# Altium PCB Driver Morpheus PONTE H.PcbDoc
Units mm, origin at the board's own origin, x right, y up, seen from the top; angles counter-clockwise.
Board outline 44.88 x 30.93 mm, 2 copper layers (Top Layer, Bottom Layer); 48 components, 26 nets, 132 pads, 10 vias.
Unrouted connection lines stored in the file: 3.
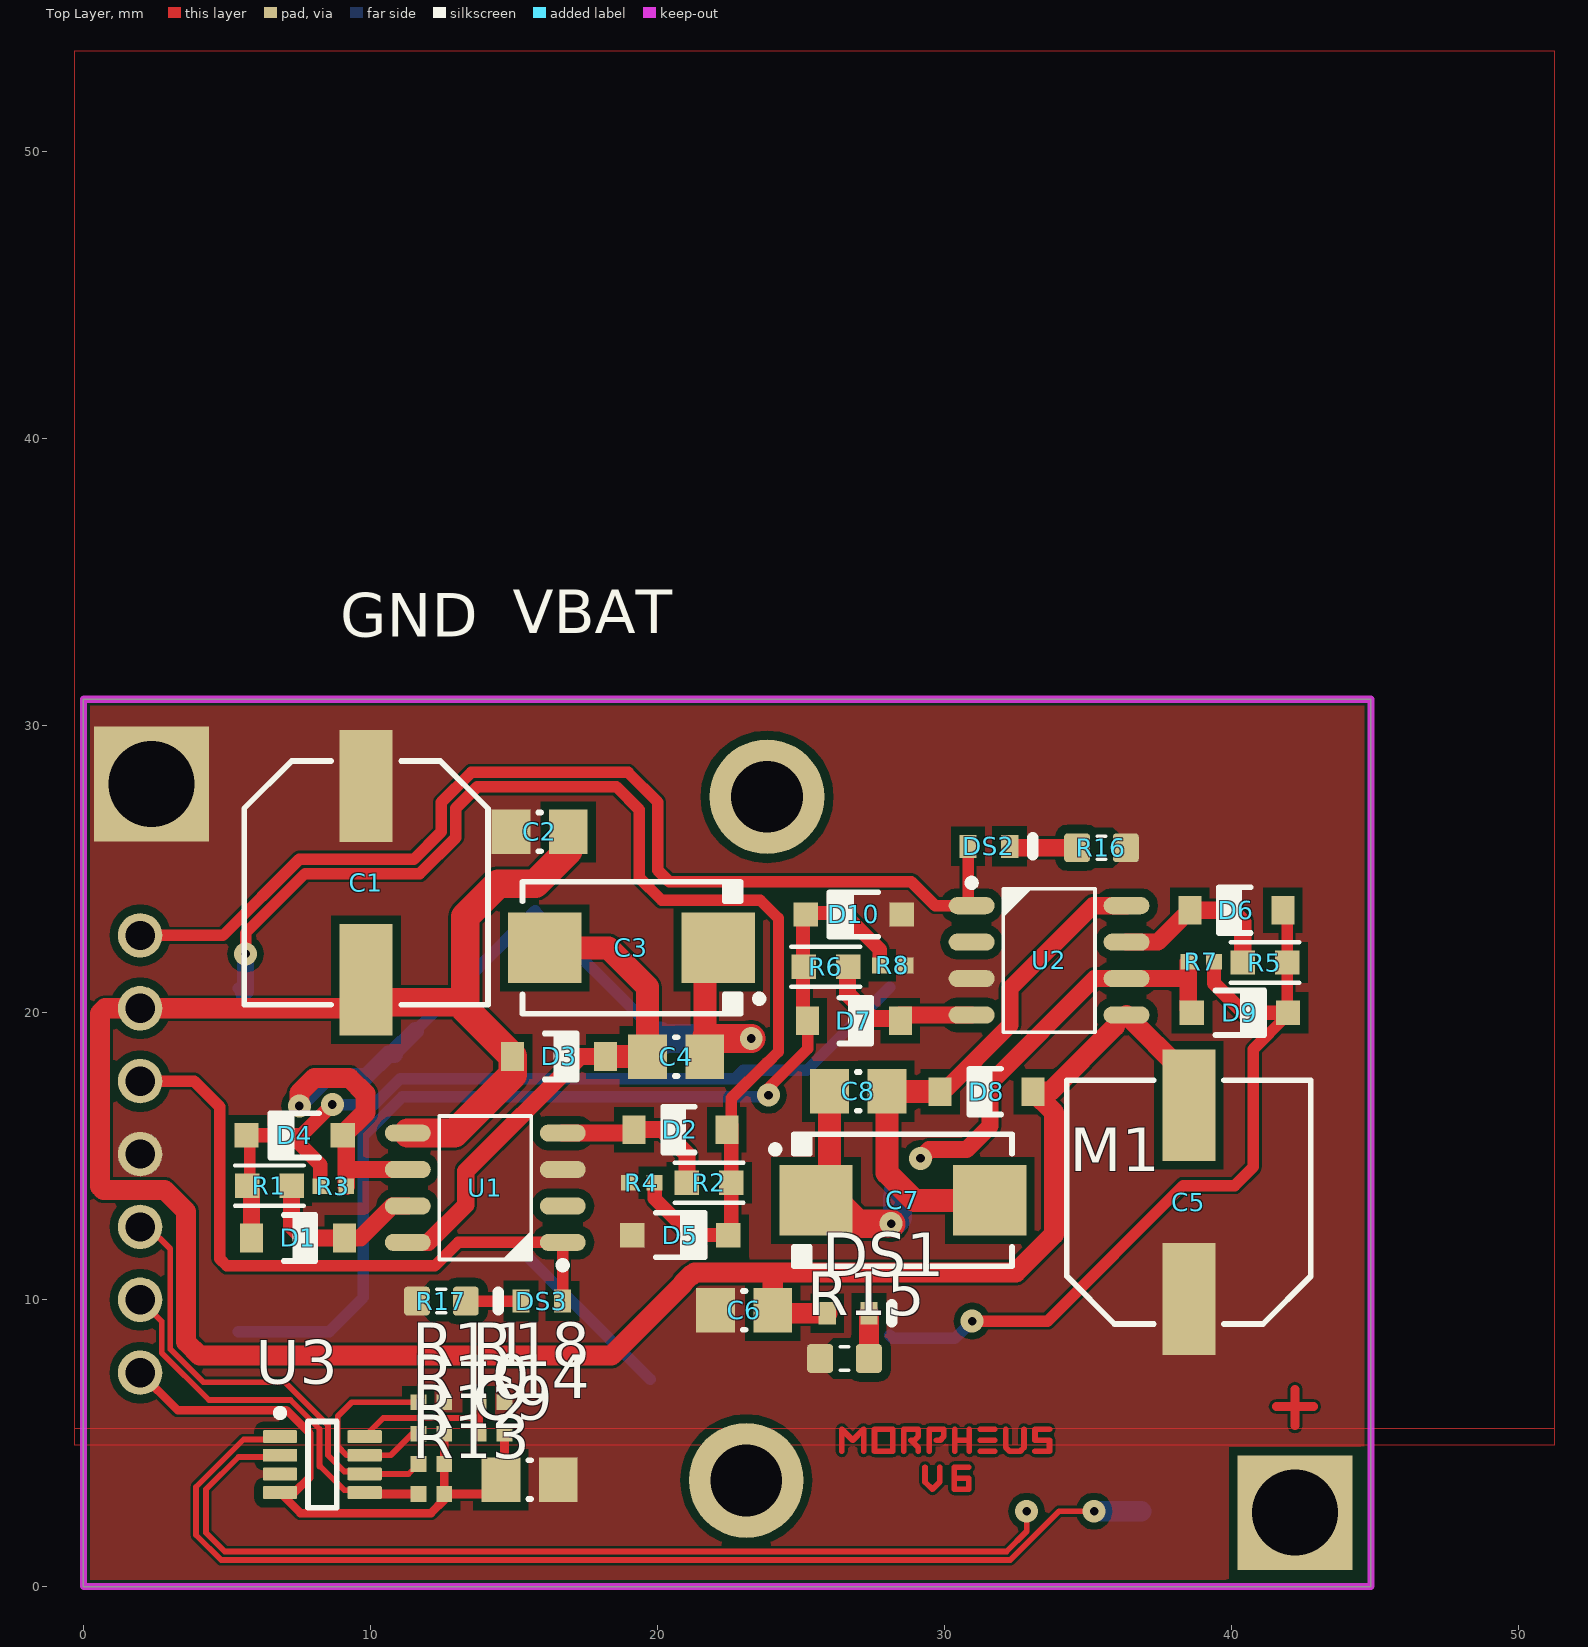
[diagram p0: Top Layer view]
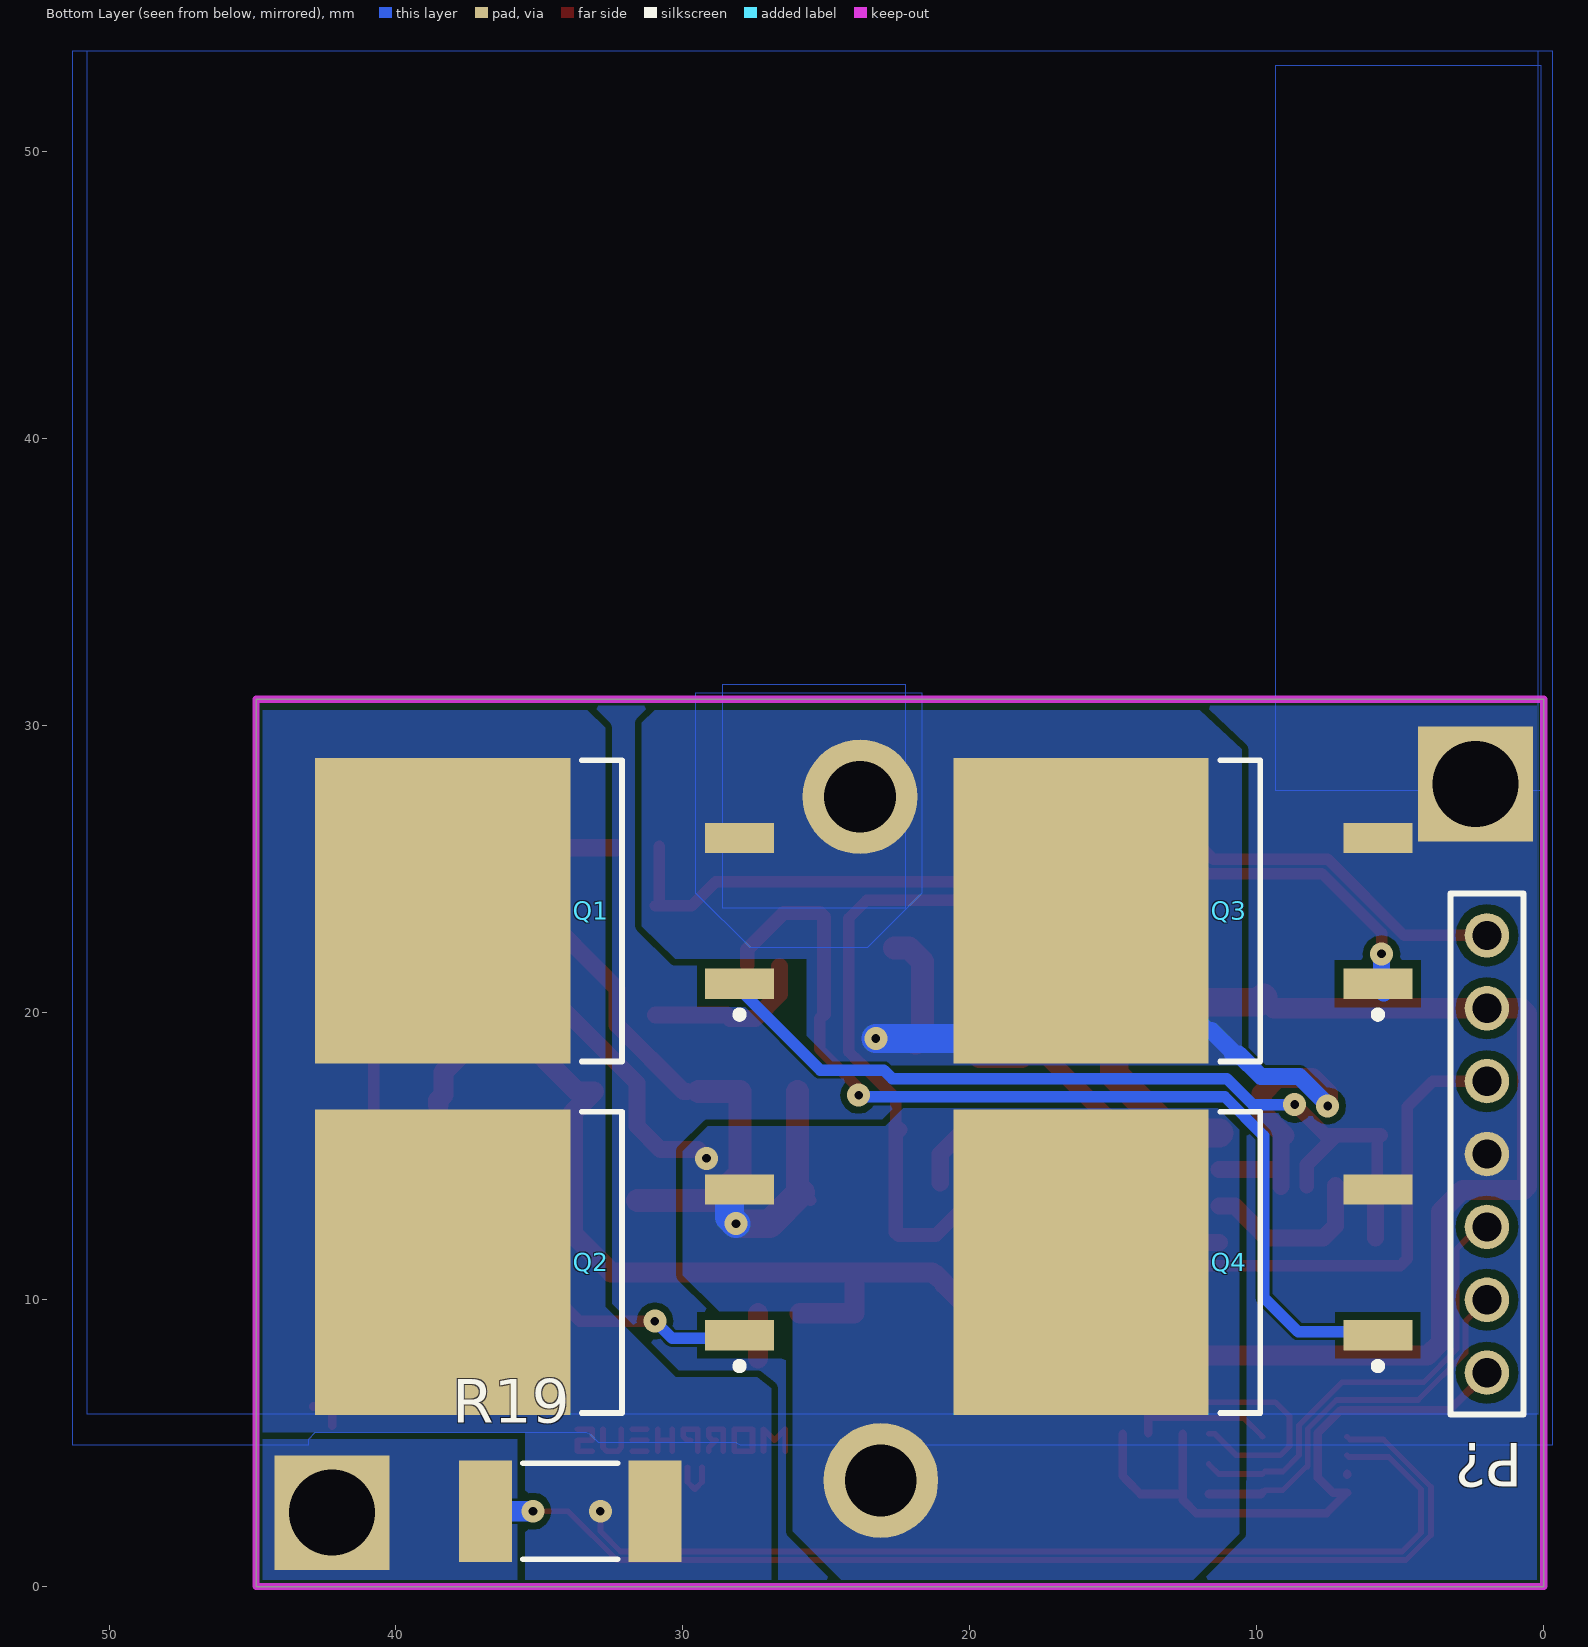
[diagram p1: Bottom Layer view, seen from below]

## Layer stack, top to bottom
Top Solder: solder mask 0.0102, Solder Resist, Dk 3.5
Top Layer: signal copper 0.0356
Dielectric 1: dielectric 0.32, FR-4, Dk 4.8
Bottom Layer: signal copper 0.0356
Bottom Solder: solder mask 0.0102, Solder Resist, Dk 3.5

## Board outline
0,0 44.875,0 44.875,30.925 0,30.925

## Design rules (kind name [scope] priority, off if disabled: settings)
BoardOutlineClearance [All] p1: gap=0 ignorepadtopadclearanceinfootprint=FALSE
Clearance Clearance_1 [IsPad vs InPolygon] p1: gap=0.3 ignorepadtopadclearanceinfootprint=TRUE
Clearance [All] p2: gap=0.24 ignorepadtopadclearanceinfootprint=TRUE except(0: SMDPad-Hole THPad-Hole Via-Hole Fill-Hole Poly-Hole Region-Hole Text-Hole; 0.1: Arc-Arc Arc-Track Arc-SMDPad Arc-THPad Arc-Via Arc-Fill Arc-Poly Arc-Region Arc-Text Arc-Hole Track-Track Track-SMDPad Track-THPad Track-Via Track-Fill Track-Poly Track-Region Track-Text Track-Hole)
ComponentClearance [All vs InComponentClass('IGNORA')] p1: gap=-1 collisioncheckmode=3 verticalgap=-1 showdistances=FALSE
ComponentClearance ComponentClearance_1 [All] p2: gap=0.254 collisioncheckmode=3 verticalgap=0.254 showdistances=FALSE
PlaneConnect [All] p1: planeconnectstyle=Direct reliefexpansion=0.508 reliefentries=4 reliefconductorwidth=0.254 reliefairgap=0.254
PolygonConnect [All] p1: connectstyle=Direct reliefconductorwidth=0.254 reliefentries=4 polygonreliefangle="90 Angle" airgapwidth=0.254
RoutingVias [All] p1: holewidth=0.3 width=0.4 viastyle="Through Hole" minholewidth=0.3 minwidth=0.4 maxholewidth=0.4 maxwidth=0.6
SMDNeckDown [InNet('No Net')] p1: percent=70.000
SolderMaskExpansion [All] p1: expansion=0.102
Width [All] p1: maxlimit=15 minlimit=0.01 preferedwidth=0.3
28 further rules are at their usual default settings.

## Classes and differential pairs
component class "Driver Morpheus SENSOR CORRENTE": C9 R10 R11 R12 R13 R14 R18 U3
component class "Driver Morpheus PONTE H": C1 C2 C3 C4 C5 C6 C7 C8 D1 D2 D3 D4 D5 D6 D7 D8 D9 D10 DS1 DS2 DS3 P? Q1 Q2 Q3 Q4 R1 R2 R3 R4 R5 R6 R7 R8 R15 R16 R17 U1 U2

## Components (designator, comment, footprint, x,y, rotation, side; value= is the part's Value field where it differs from the comment)
C1 "100uF 25v" CAPAE9083X70M 9.85,24.525 r270 top
C2 "CAP 100nF 25V 0805(2012)" CAPC0805(2012)145_M#1 15.9,26.3 r0 top value=100nF
C3 "Cap_10u_35v" "CAP POL 2917/7343" 19.101,22.262 r180 top
C4 "CAP 100nF 25V 0805(2012)" CAPC0805(2012)145_M#2 196.297,-55.572 r180 top value=100nF
C5 "100uF 25v" CAPAE9083X70M 38.525,13.4 r90 top
C6 "CAP 100nF 25V 0805(2012)" CAPC0805(2012)145_M#1 23.025,9.625 r0 top value=100nF
C7 "Cap_10u_35v" "CAP POL 2917/7343" 28.561,13.463 r0 top
C8 "CAP 100nF 25V 0805(2012)" CAPC0805(2012)145_M#2 -148.635,91.297 r0 top value=100nF
C9 "CAP 100nF 25V 0805(2012)" CAPC0805(2012)145_M#1 15.55,3.725 r180 top value=100nF
D1 "1N4148W" JSCJ-SOD-123-2_V 7.481,12.15 r0 top
D2 "1N4148W" JSCJ-SOD-123-2_V 20.806,15.925 r180 top
D3 "1N4148W" JSCJ-SOD-123-2_V 16.581,18.475 r0 top
D4 "MMSZ5246B-E3-08" VISH-SOD-123-2_V 7.356,15.725 r180 top
D5 "MMSZ5246B-E3-08" VISH-SOD-123-2_V 20.8,12.25 r0 top
D6 "1N4148W" JSCJ-SOD-123-2_V 40.181,23.575 r180 top
D7 "1N4148W" JSCJ-SOD-123-2_V 26.85,19.725 r0 top
D8 "1N4148W" JSCJ-SOD-123-2_V 31.48,17.25 r180 top
D9 "MMSZ5246B-E3-08" VISH-SOD-123-2_V 40.306,20 r0 top
D10 "MMSZ5246B-E3-08" VISH-SOD-123-2_V 26.85,23.425 r180 top
DS1 "TLMB1100-GS08" VISH-TLMX1100-2_V 26.65,9.525 r0 top
DS2 "TLMB1100-GS08" VISH-TLMX1100-2_V 31.556,25.8 r0 top
DS3 "TLMB1100-GS08" VISH-TLMX1100-2_V 15.975,9.95 r180 top
P? "TSW-107-05-T-S" SMTC-TSW-107-05-X-S 1.975,22.695 r270 bottom
Q1 "IRF3205S" D2PAK_N 34.825,23.55 r0 bottom
Q2 "IRF3205S" D2PAK_N 34.825,11.3 r0 bottom
Q3 "IRF3205S" D2PAK_N 12.575,23.55 r0 bottom
Q4 "IRF3205S" D2PAK_N 12.575,11.3 r0 bottom
R1 "22" SMD-0603-RES 6.481,13.975 r270 top
R2 "22" SMD-0603-RES 21.806,14.075 r90 top
R3 "RC0402JR-071KL" RES-0402 8.706,13.95 r180 top value=1K
R4 "RC0402JR-071KL" RES-0402 19.456,14.075 r0 top value=1K
R5 "22" SMD-0603-RES 41.181,21.75 r270 top
R6 "22" SMD-0603-RES 25.875,21.6 r90 top
R7 "RC0402JR-071KL" RES-0402 38.956,21.775 r0 top value=1K
R8 "RC0402JR-071KL" RES-0402 28.206,21.65 r180 top value=1K
R10 "RC0402JR-071KL" RES-0402 12.125,5.325 r0 top value=10K
R11 "RC0402JR-071KL" RES-0402 12.125,6.425 r180 top value=10K
R12 "RC0402JR-071KL" RES-0402 12.125,4.275 r0 top value=10K
R13 "RC0402JR-071KL" RES-0402 12.125,3.225 r0 top value=10K
R14 "RC0402JR-071KL" RES-0402 14.225,5.325 r0 top value=10K
R15 "Thick Film" RESC1608X55N 26.525,7.95 r180 top value=1k
R16 "Thick Film" RESC1608X55N 35.481,25.75 r0 top value=220R
R17 "Thick Film" RESC1608X55N 12.475,9.95 r180 top value=220R
R18 "RC0402JR-071KL" RES-0402 14.225,6.425 r180 top value=10K
R19 "71-WSLF25121L000FEA" RESC6432X89X76ML25T25 33.925,2.625 r0 bottom
U1 "IR2184" SOIC127P600X175-8AN 14.006,13.9 r180 top
U2 "IR2184" SOIC127P600X175-8AN 33.656,21.825 r0 top
U3 "INA219AIDCNR" DCN0008A_M 8.325,4.25 r0 top

## Footprints (in the part's own frame and the unit in brackets; to place one, negate y for a bottom-side part, rotate by r counter-clockwise, add the part's x,y. Pads: shape width x height; smd on the part's side, far side on the other; paste and mask are expansions set on the pad)
"CAP POL 2917/7343" [mm] "Molded Capacitor, 2-Leads, Body 7.30x4.30mm, IPC Medium Density"
  rect 2.55x2.45 smd: 1(-3.025,0) 2(3.025,0)
  silkscreen extent -4.58,-2.3 3.8,2.3, body extent -3.65,-2.15 3.65,2.15, height 4.1
CAPAE9083X70M [mm] "Aluminum Electrolytic Capacitor, Body 8,30x8,30x7,00mm, IPC Low Density"
  rect 3.9x1.85 smd: 1(-3.375,0) 2(3.375,0)
  silkscreen extent -4.25,-4.25 4.25,4.25, body extent -4.25,-4.25 4.25,4.25, height 7
CAPC0805(2012)145_M#1 [mm] "Chip Capacitor, Body 2.0x1.2mm, Height 1.45mm, IPC Low Density"
  rect 1.35x1.55 smd: 1(-1,0) 2(1,0)
  silkscreen extent -0.05,-0.67 0.05,0.67, body extent -1.1,-0.72 1.1,0.72, height 1.45
CAPC0805(2012)145_M#2 [mm] "Chip Capacitor, Body 2.0x1.2mm, Height 1.45mm, IPC Low Density"
  rect 1.35x1.55 smd: 1(174.641,-74.041) 2(176.641,-74.041)
  silkscreen extent 175.59,-74.72 175.69,-73.37, body extent 174.54,-74.77 176.74,-73.32, height 1.45
D2PAK_N [mm] "D-PAK/TO-263-3; 3 Leads (1 Cropped); Body 14.7 (inc. leads) x 10.2 mm (LxW max)"
  rect 2.4x1.05 smd: 1(-6.8,2.54) 3(-6.8,-2.54)
  rect 8.9x10.65 smd: 2(3.55,0)
  silkscreen extent -6.92,-5.25 -1.3,5.25, body extent -2.7,-5.28 6.3,5.28, height 4.69
DCN0008A_M [mm] "SOT23, 8-Leads, Body 3x1.75mm, Pitch 0.65mm, IPC Low Density"
  rrect22% 1.2x0.45 smd: 1(-1.475,0.975) 2(-1.475,0.325) 3(-1.475,-0.325) 4(-1.475,-0.975) 5(1.475,-0.975) 6(1.475,-0.325) 7(1.475,0.325) 8(1.475,0.975)
  silkscreen extent -1.6,-1.5 0.5,1.92, body extent -0.88,-1.5 0.87,1.5, height 1.45
JSCJ-SOD-123-2_V [mm] "SMD, 2-Leads, Body 2.7x1.6mm, Height 1.25mm"
  rect 0.8x1 smd: 1(-1.62,0) 2(1.62,0)
  silkscreen extent -0.5,-0.8 0.6,0.8, body extent -1.35,-0.8 1.35,0.8, height 1.25
RES-0402 [mm]
  rect 0.55x0.55 smd: 1(-0.45,0) 2(0.45,0)
  body extent -0.53,-0.27 0.53,0.28, height 0.4
RESC1608X55N [mm] "Chip Resistor, Body 1.6x0.8mm, EIA 0603, IPC Medium Density"
  round 0.254 on Mech15: 0(0,0)
  rrect25% 0.9x1 smd: 1(-0.85,0) 2(0.85,0)
  Top Layer pour cut-out: -0.6,0.5 -0.4,0.7 0.4,0.7 0.6,0.5 0.6,-0.5 0.4,-0.7 -0.4,-0.7 -0.6,-0.5
  silkscreen extent -0.15,-0.41 0.15,0.41, body extent -0.87,-0.47 0.88,0.48, height 0.54
RESC6432X89X76ML25T25 [mm] "Chip Resistor, 2-Leads, Body 6.6x3.43mm, IPC Low Density"
  rect 1.85x3.55 smd: 1(-2.95,0) 2(2.95,0)
  silkscreen extent -1.65,-1.68 1.65,1.68, body extent -3.3,-1.72 3.3,1.71, height 0.89
SMD-0603-RES [mm]
  rect 0.85x0.85 smd: 1(0,0.775) 2(0,-0.775)
  silkscreen extent -0.7,-1.2 0.7,1.2, body extent -0.4,-0.85 0.4,0.85, height 0.56
SMTC-TSW-107-05-X-S [mm] ".025 SQ Post Terminal Strip Assembly, 1x7 Pins, Vertical, 2.54mm Pitch, Male"
  round 1.55 hole 1.02: 1(0,0) 2(2.54,0) 3(5.08,0) 4(7.62,0) 5(10.16,0) 6(12.7,0) 7(15.24,0)
  silkscreen extent -1.46,-1.27 16.7,1.27, body extent -1.27,-1.27 16.51,1.27, height 5.21
SOIC127P600X175-8AN [mm] "SOIC, 8-Leads, Body 4.9x3.9mm, Pitch 1.27mm, IPC Medium Density"
  round 1 on Mech15: 0(0,0)
  oval 1.6x0.6 smd: 1(-2.7,1.905) 2(-2.7,0.635) 3(-2.7,-0.635) 4(-2.7,-1.905) 5(2.7,-1.905) 6(2.7,-0.635) 7(2.7,0.635) 8(2.7,1.905)
  silkscreen extent -2.83,-2.5 1.6,2.82, body extent -3,-2.45 3,2.45, height 1.75
VISH-SOD-123-2_V [mm] "SMD, 2-Leads, Body 2.7x1.55mm, Height 1.35mm"
  rect 0.85x0.85 smd: 1(-1.675,0) 2(1.675,0)
  silkscreen extent -0.85,-0.78 0.85,0.78, body extent -1.35,-0.77 1.35,0.77, height 1.35
VISH-TLMX1100-2_V [mm] "SMD, 2-Leads, Body 1.6x0.8mm"
  rect 0.6x0.8 smd: 1(-0.725,0) 2(0.725,0)
  silkscreen extent 1.53,-0.3 1.53,0.3, body extent -0.8,-0.4 0.8,0.4, height 0.65

## Part data
C1: library part Cap_10u_35v
C2 C4 C6 C8 C9: library part CMP-1036-04408-1, "CAP 100nF 25V ±5% 0805 (2012 Metric) Thickness 1.45mm SMD", Case-EIA=0805, Case-Metric=2012, Rated Voltage="25 V", Tolerance=±5%, Max Thickness="1.45 mm", Technology=SMT
C5: library part Cap_100u_25v, "Cap Tântalo"
D1 D2 D3 D6 D7 D8: library part CMP-0914-00001-1, "Fast Switching Diode, 75 V, 150 mA, 2-Pin 2.7 x 1.6 x 1.25 mm SMD, Tape and Reel", Manufacturer="Changjiang Electronics", ComponentLink1Description="Manufacturer URL", ComponentLink1URL=http://www.cj-elec.com/, ComponentLink2Description=Datasheet, ComponentLink2URL=http://www.cj-elec.com/txUpfile/20121613352740313.pdf, ComponentLink3Description="Package Specification", ComponentLink3URL=http://www.cj-elec.com/txUpfile/201412112231195145.pdf, DatasheetVersion="Rev. A", IO (mA)=150, IR (uA)=1, Mounting Technology="Surface Mount", PackageDescription="2-Pin SMD, Body 2.7 x 1.6 mm, Height 1.25 mm", PackageReference=SOD-123-2, PackageVersion="Rev. A", Packing="Tape and Reel", PartNumber=1N4148W, PD (mW)=350, Trr (ns)=4, TSTG (degC)="-55 to 150", VF (V)=1.25, VR (V)=75
D4 D5 D9 D10: library part CMP-0931-00032-1, "Small Signal Zener Diode, 16 V +/- 5%, -55 to 155 degC, 2-Pin SOD-123, RoHS, Tape and Reel", Manufacturer="Vishay Semiconductor", Operating Temperature="-55 to 150 degC", Power Dissipation (mW)=500, Test Current (IZT1) (mA)=7.8, Tolerance="+/- 5%", Zener Voltage (NOM.) (V)=16, ComponentLink1Description="Manufacturer URL", ComponentLink1URL=http://www.vishay.com/, ComponentLink2Description=Datasheet, ComponentLink2URL=http://www.vishay.com/docs/85774/mmsz5225.pdf, ComponentLink3Description="Package Specification", ComponentLink3URL=http://www.vishay.com/docs/85774/mmsz5225.pdf, DatasheetVersion="Rev. 1.9", Int. Construction=Single, Mounting Technology="Surface Mount", PackageDescription="2-Pin SMD, Body 2.7 x 1.55 mm, Height 1.35 mm", PackageReference=SOD-123-2, PackageVersion="Rev. 1.9", Packing="Tape and Reel", PartNumber=MMSZ5246B-E3-08, RoHS=TRUE, Zener Impedance (IZT1) (Max.) (Ohm)=17
DS1 DS2 DS3: library part CMP-1666-00028-1, "Blue LED, 10 mA, 3.9 V, -40 to 100 degC, 2-Pin SMD (0603), RoHS, Tape and Reel", Capacitance="10 nF", Case\Package=Radial, Max Operating Temperature="125 degC", Min Operating Temperature="-55 degC", Package Quantity=500, Tolerance=10%, Type (Capacitors)=X7R, Voltage Rating="100 V", ComponentLink1Description="Manufacturer URL", ComponentLink1URL=http://www.vishay.com/, ComponentLink2Description=Datasheet, ComponentLink2URL=http://download.siliconexpert.com/pdfs/2016/8/7/12/43/26/667/vsh_/manual/379263299541529tlmb1100.pdf, DatasheetVersion="Rev. 2.7, 03/2016", Height="2.54 mm", Lead Pitch="2.54 mm", Length="5.33 mm", Mount="Through Hole", PackageDescription="2-Pin Surface Mount Device, Body 1.6 x 0.8 mm", PackageReference=0603, Packaging=Bulk, Pins=2, Radiation Hardening=No, REACH SVHC="No SVHC", RoHSCompliant=true, Width="3.81 mm"
P?: library part CMP-1024-00399-1, Manufacturer=Samtec, Temperature Range="-55 to 105 degC", ComponentLink1Description="Manufacturer URL", ComponentLink1URL=http://www.samtec.com, ComponentLink2Description=Datasheet, ComponentLink2URL=http://www.samtec.com/documents/webfiles/pdf/TSW_TH.PDF, ComponentLink3Description="Package Specification", ComponentLink3URL=http://www.samtec.com/documents/webfiles/cpdf/TSW-XXX-XX-XXX-X-XX-XXX-MKT.pdf, DatasheetVersion=F-214, Mounting Technology=Through-hole, Orientation=Vertical, PackageDescription=".025[0.64] SQ. Post Terminal Strip Assembly", PackageReference=TSW-107-05-X-S, PackageVersion="DM, 8/1988", PartNumber=TSW-107-05-T-S, Pitch="2.54 mm", RoHS=True
Q1 Q2 Q3 Q4: "HEXFET Power MOSFET", ComponentLink1Description="Manufacturer Link", ComponentLink1URL=http://www.irf.com/, ComponentLink2Description=Datasheet, ComponentLink2URL=http://www.irf.com/product-info/datasheets/data/irf3205s.pdf, DatasheetVersion=Aug-1997, LatestRevisionDate=20-Nov-2009, LatestRevisionNote="IPC-7351 Footprint Added.", PackageDescription="3-Pin Transistor Outline Package 2.54 mm Pitch, 15.1 mm Lead Span", PackageReference=D2PAK, Published=8-Jun-2000, Publisher="Altium Limited"
R1 R2 R5 R6: library part ERJ-3EKF22R0V, "RES SMD 22 OHM 1% 1/10W 0603", Digi-Key Part Number=P22.0HCT-ND, Manufacturer="Panasonic Electronic Components", Operating Temperature="-55°C ~ 155°C", Package / Case="0603 (1608 Metric)", Power (Watts)="0.1W, 1/10W", Supplier Device Package=0603, Temperature Coefficient=±100ppm/°C, Tolerance=±1%, @ qty=1500, Composition="Thick Film", Datasheets=http://industrial.panasonic.com/www-cgi/jvcr13pz.cgi?E+PZ+3+AOA0002+ERJ3EKF22R0V+7+WW, Factory Stock=0, Failure Rate=-, Features="Automotive AEC-Q200", Height - Seated (Max)="0.022\" (0.55mm)", Image=//media.digikey.com/Photos/Panasonic%20Photos/MFG_ERJ-P6W%20Series.jpg, Minimum Quantity=1, Number of Terminations=2, Packaging="Cut Tape (CT)", Part Number=ERJ-3EKF22R0V, Part Status=Active, Quantity Available=100321, Series=ERJ, Size / Dimension="0.063\" L x 0.031\" W (1.60mm x 0.80mm)", Unit Price (USD)=0.00379
R3 R4 R7 R8 R10 R11 R12 R13 R14 R18: library part "RES 1K 0402", "RES SMD 1K OHM 5% 1/16W 0402"
R15 R16 R17: library part RES_220R_0603_5%, "Resistor SMD chip 220 Ohm 0.1W 5% 0603", Manufacturer 1=Yageo, Manufacturer 2="Panasonic Electronic Components", Manufacturer 3="Stackpole Electronics Inc", Manufacturer 4="Rohm Semiconductor", Manufacturer 5="Royal Ohm", Manufacturer Part Number 1=RC0603JR-07220RL, Manufacturer Part Number 2=ERJ-3GEYJ221V, Manufacturer Part Number 3=RMCF0603JT220R, Manufacturer Part Number 4=MCR03ERTJ221, Manufacturer Part Number 5=0603WAJ0221, Package / Case="0603 (1608 metric)", Ratings="1/10 W", Supplier Part Number 1=311-220GRCT-ND, Tolerance=±5%, ComponentLink1Description=http://www.yageo.com/documents/recent/PYu-RC0603_51_RoHS_L_4.pdf, ComponentLink1URL=http://www.yageo.com/documents/recent/PYu-RC0603_51_RoHS_L_4.pdf, ComponentLink2Description=http://industrial.panasonic.com/www-cgi/jvcr13pz.cgi?E+PZ+3+AOA0001+ERJ3GEYJ221V+7+WW, ComponentLink2URL=http://industrial.panasonic.com/www-cgi/jvcr13pz.cgi?E+PZ+3+AOA0001+ERJ3GEYJ221V+7+WW, ComponentLink3Description=http://www.seielect.com/Catalog/SEI-RMCF_RMCP.pdf, ComponentLink3URL=http://www.seielect.com/Catalog/SEI-RMCF_RMCP.pdf, ComponentLink4Description=http://rohmfs.rohm.com/en/products/databook/datasheet/passive/resistor/chip_resistor/mcr_g.pdf, ComponentLink4URL=http://rohmfs.rohm.com/en/products/databook/datasheet/passive/resistor/chip_resistor/mcr_g.pdf, Material="Thick Film", RoHS 1="RoHS Compliant", RoHS 2="RoHS Compliant", RoHS 3="RoHS Compliant", RoHS 4="RoHS Compliant", SCDType=spec, Supplier 1=Digi-Key, Supplier 2=Digi-Key, Supplier 3=Digi-Key, Supplier 4=Digi-Key, Supplier Part Number 2=P220GCT-ND, Supplier Part Number 3=RMCF0603JT220RCT-ND, Supplier Part Number 4=RHM220CGCT-ND
R19: library part CMP-2000-07419-1, "Chip Resistor, 9 mOhm, +/- 1%, 1 W, -65 to 170 degC, 2512 (6432 Metric), RoHS, Tape and Reel                        71-WSLF25121L000FEA", Case Code - in=2512, Case Code - mm=6432, Case Height=0.635mm, Case Length=6.4mm, Case Width=3.2mm, Manufacturer=Vishay, Operating Temperature Range=-65Cto+170C, Package / Case=2512(6432metric), Package Description="2-Pin Surface Mount Device, Body 6.35 x 3.18 mm", Power Rating=6W, Resistance=0.009Ohms, Temperature Coefficient=75PPM/C, Tolerance=1%, Brand=Vishay/Dale, Datasheet URL=http://www.vishay.com/docs/30100/wsl.pdf, Datasheet Version=07/2016, Factory Pack Quantity=2000, Manufacturer URL=http://www.vishay.com/, Mounting Technology=SurfaceMount, Package Reference=2512, Packaging=Reel, Product=MetalElementCurrentSensingResistors, Product Category=CurrentSenseResistors-SMD, RoHS=Details, Series=WSL, Termination Style=SMD/SMT, Type=PowerMetalStripResistors,LowValue(downto0.0005Ohms),SurfaceMount
U1 U2: PSpiceTemplate="X^@REFDES %VCC %IN %SD %COM %VB %HO %VS %LO @MODEL PARAMS:  ?CDELAY|CDELAY=@CDELAY||CDELAY=50N| ?RDELAY|RDELAY=@RDELAY||RDELAY=50| ?T1|T1=@T1||T1=-40| ?T2|T2=@T2||T2=25| ?T3|T3=@T3||T3=125| ?V1|V1=@V1||V1=10| ?V2|V2=@V2||V2=15| ?V3|V3=@V3||V3=20| ?TOFFT1|TOFFT1=@TOFFT1||TOFFT1=270N| ?TOFFT2|TOFFT2=@TOFFT2||TOFFT2=270N| ?TOFFT3|TOFFT3=@TOFFT3||TOFFT3=270N| ?TOFFV1|TOFFV1=@TOFFV1||TOFFV1=270N| ?TOFFV2|TOFFV2=@TOFFV2||TOFFV2=270N| ?TOFFV3|TOFFV3=@TOFFV3||TOFFV3=270N| ?TONT1|TONT1=@TONT1||TONT1=210N| ?TONT2|TONT2=@TONT2||TONT2=210N| ?TONT3|TONT3=@TONT3||TONT3=210N| ?TONV1|TONV1=@TONV1||TONV1=210N| ?TONV2|TONV2=@TONV2||TONV2=210N| ?TONV3|TONV3=@TONV3||TONV3=210N|", CDELAY=50N, RDELAY=50, T1=-40, T2=25, T3=125, TOFFT1=270N, TOFFT2=270N, TOFFT3=270N, TOFFV1=270N, TOFFV2=270N, TOFFV3=270N, TONT1=210N, TONT2=210N, TONT3=210N, TONV1=210N, TONV2=210N, TONV3=210N, V1=10, V2=15, V3=20
U3: library part CMP-0704-00041-2, "Zero-Drift, Bi-directional Current / Power Monitor, 3 to 5.5 V, -40 to 125 degC, 8-pin SOP (DCN8), Green (RoHS & no Sb/Br)", Manufacturer="Texas Instruments", Quiescent Current (+/-)(Typ)(mA)=0.7, Rating=Catalog, CMRR(Min)(dB)=100, Code_JEDEC=MO-178, Common Mode Range(Max)(V)=26, Common Mode Range(Min)(V)=0, ComponentLink1Description="Manufacturer URL", ComponentLink1URL=http://www.ti.com/, ComponentLink2Description=Datasheet, ComponentLink2URL=http://www.ti.com/general/docs/lit/getliterature.tsp?genericPartNumber=INA219&fileType=pdf, ComponentLink3Description="Package Specification", ComponentLink3URL=http://www.ti.com/lit/ml/mpds099c/mpds099c.pdf, DatasheetVersion=SBOS448F, Eco-Plan="Green (RoHS & no Sb/Br)", Gain(V/V)="1, 0.5, 0.25, 0.125", Input Offset (+/-)(Max)(uV)=100, Mounting Technology="Surface Mount", PackageDescription="8-Pin Plastic Small Outline, Body 1.6 x 2.9 mm, Pitch 0.65 mm", PackageReference=DCN0008A, PackageVersion="4202106/D, 11/2009", PartNumber=INA219AIDCNR, Small-Signal Bandwidth(Typ)(MHz)=0.011, SubFamily="Current Shunt Monitor", Vs(Max)(V)=5.5, Vs(Min)(V)=3

## Free pads (board coordinates)
  rect 4x4 hole 3: 8(2.375,27.975) 8(42.225,2.575)
  round 4 hole 2.5: 8(23.1,3.7) 8(23.825,27.525)

## Via types
v1: diameter 0.8, hole 0.3, Top Layer to Bottom Layer, 10 vias

## Nets (pads, with @x,y where several pads share a name; then routed paths per layer and width w, separated by ;. In a path a pad name is that pad's centre, name@x,y a point inside that pad or via, vN(x,y) a via of type N, cw(c..) or ccw(c..) an arc to the next point about the centre after c; other vN are vias at no path point)
+3.3v: C9.2 P?.7 R10.2 R12.2 R13.2 R14.2 U3.4 | length 21.9
  Top Layer w0.3: P?.7 3.28,6.15 7.075,6.15 7.875,5.35 7.875,3.8 7.35,3.275 U3.4 7.565,2.56 12.112,2.56 12.575,3.023 R13.2 ; R10.2 R12.2 R13.2 ; R14.2 14.675,3.85 C9.2 14.05,3.225 R13.2
+12V: C1.2 C2.2 C5.2 C6.2 D3.1 D8.1 DS1.1 P?.2 U1.5 U2.5 | length 91.4
  Top Layer w0.4: C2.2@16.9,25.65 C2.2
  Top Layer w0.7: C1.2@9.775,20.525 9.405,20.155 P?.2 0.755,20.155 0.577,19.977 0.577,13.941 0.693,13.825 2.825,13.825 3.575,13.075 3.575,8.525 4.05,8.05 18.4,8.05 20.9,10.55 20.9,10.586 21.164,10.85 21.2,10.85 21.3,10.95 24.025,10.95 ; C6.2@24.025,9.525 DS1.1 ; C6.2 24.025,10.95 ; 35.956,19.519 33.686,17.25 D8.1 33.825,16.525 33.825,12.275 32.5,10.95 24.025,10.95 ; U2.5 38.35,17.926 38.35,17.125 38.525,16.95 C5.2
  Top Layer w1: C1.2@9.775,20.525 9.931,20.369 13.306,20.369 ; U1.5 12.93,15.805 14.961,17.836 D3.1 13.306,20.13 13.306,20.369 ; C2.2@16.9,25.65 15.75,24.5 14.456,24.5 13.306,23.35 13.306,20.369
A0: R10.1 R11.2 U3.7 | length 7.3
  Top Layer w0.2: R10.1 11.462,5.325 10.712,4.575 U3.7 9.173,4.575 8.86,4.888 8.86,5.935 9.35,6.425 R11.2
A1: R14.1 R18.2 U3.8 | length 5.3
  Top Layer w0.1: 13.725,5.875 13.775,5.825
  Top Layer w0.2: U3.8 10.45,5.875 13.725,5.875
  Top Layer w0.3: R14.1@13.775,5.35 13.775,5.825 R18.2@13.775,6.4
"BAT 5S": pad.8@42.225,2.575 R19.2 U3.1 | length 39.3
  Top Layer w0.2: U3.1 6.75,5.125 5.583,5.125 3.925,3.467 3.925,1.801 4.801,0.925 32.3,0.925 34,2.625 v1(35.225,2.625)
  Bottom Layer w0.7: v1(35.225,2.625) R19.2
GND: C1.1 C2.1 C5.1 C6.1 C9.1 D5.1 D10.1 P?.4 pad.8@2.375,27.975 Q3.3 Q4.3 R4.1 R8.1 R11.1 R15.2 R16.2 R17.2 R18.1 U1.3 U2.3 U3.3 | length 0
  Top Layer w0.3: U3.3@6.85,3.89 U3.3
IN_1: DS3.1 P?.3 U1.1 | length 23.2
  Top Layer w0.4: P?.3@1.625,17.615 P?.3 3.86,17.615 4.75,16.725 4.75,11.425 5,11.175 12.247,11.175 13.067,11.995 U1.1 16.7,11.989 DS3.1
IN_2: DS2.1 P?.1 U2.1 | length 37.7
  Top Layer w0.4: P?.1@1.625,22.695 P?.1 4.863,22.695 7.518,25.35 11.518,25.35 12.475,26.307 12.475,27.332 13.518,28.375 18.98,28.375 20.015,27.34 20.015,24.965 20.413,24.567 28.855,24.567 29.692,23.73 U2.1@30.831,23.73 ; DS2.1 U2.1@30.831,23.73 ; U2.1 U2.1@30.831,23.73
NetC3_1: C3.1 C4.1 D4.1 pad.8@23.825,27.525 Q1.3 Q3.2 R3.1 U1.6 | length 34.8
  Top Layer w0.4: D4.1 D4.1@9.156,15.6 ; 21.656,19.275 C4.1@21.731,19.2
  Top Layer w0.6: R3.1 D4.1@9.156,15.6 ; 9.171,14.535 U1.6
  Top Layer w0.7: v1(7.525,16.75) 7.525,17.2 8.05,17.725 9.275,17.725 9.825,17.175 9.825,16.519 D4.1
  Top Layer w0.8: 21.656,19.275 21.656,21.792 C3.1 C3.1@22.633,22.262
  Top Layer w1: C4.1@21.731,19.2 21.881,19.05 21.931,19.1 v1(23.275,19.1)
  Bottom Layer w0.4: 11.575,19.375 Q3.2@15.75,23.55 ; Q3.2@15.75,23.525 Q3.2@20.075,19.2
  Bottom Layer w0.6: v1(7.525,16.75) 7.525,16.782 8.518,17.775 9.85,17.775 10.631,18.556 10.844,18.556 ; 10.8,18.6 11.575,19.375
  Bottom Layer w1: Q3.2@20.075,19.2 20.225,19.05 20.275,19.1 v1(23.275,19.1)
NetC3_2: C3.2 C4.2 D3.2 U1.8 | length 18.3
  Top Layer w0.6: U1.8 12.02,11.995 13.325,13.3 13.325,14.475 17.325,18.475 D3.2
  Top Layer w0.8: C3.2 18.294,22.262 19.656,20.9 C4.2 ; D3.2 C4.2@19.65,18.475
NetC7_1: C7.1 C8.1 D9.1 pad.8@23.1,3.7 Q2.3 Q4.2 R7.1 U2.6 | length 28.9
  Top Layer w0.4: C7.1 25.798,13.725 C7.1@25.9,13.725 ; D9.1@38.506,19.819 D9.1@38.506,20.125
  Top Layer w0.6: C8.1@26.001,17.261 C8.1 ; v1(29.175,14.925) 29.478,15.228 30.778,15.228 31.6,16.05 31.6,17.55 35.24,21.19 U2.6 38.491,21.19 ; D9.1@38.506,20.125 R7.1
  Top Layer w0.8: C7.1@25.798,13.725 26.006,13.933 C8.1
  Top Layer w1: C7.1@25.9,13.725 26.975,12.65 v1(28.15,12.65)
  Bottom Layer w0.4: Q4.2@15.55,11.425 Q4.2@19.75,7.225 ; Q2.3@28.1,13.84 Q2.3@28.375,13.565
  Bottom Layer w1: v1(28.15,12.65) 28.375,12.875 Q2.3@28.375,13.565
NetC7_2: C7.2 C8.2 D8.2 U2.8 | length 18.2
  Top Layer w0.6: D8.2 29.974,17.25 32.296,19.572 32.296,20.842 35.184,23.73 U2.8
  Top Layer w0.8: D8.2@29.461,17.25 C8.2 28.006,14.419 28.962,13.463 C7.2
NetD1_1: D1.1 D4.2 Q1.1 R1.2 R3.2 | length 30.4
  Top Layer w0.4: R1.2 5.8,14.069 D4.2@5.8,15.725
  Top Layer w0.5: D4.2 5.8,15.725 7.231,15.725 ; R3.2 8.256,14.7 7.231,15.725 ; v1(8.675,16.801) 7.6,15.725 7.231,15.725
  Top Layer w0.6: R1.2 5.861,13.82 D1.1
  Bottom Layer w0.4: v1(8.675,16.801) 10.136,16.801 11.041,17.705 22.705,17.705 23,18 25.215,18 Q1.1@28.1,20.885
NetD1_2: D1.2 R1.1 U1.7 | length 6.1
  Top Layer w0.6: R1.1 7.256,12.575 7.681,12.15 D1.2 9.65,12.15 10.765,13.265 U1.7
NetD2_1: D2.1 D5.2 Q3.1 R2.2 R4.2 | length 42.8
  Top Layer w0.4: v1(5.65,22.05) 5.65,22.775 7.725,24.85 11.725,24.85 12.975,26.1 12.975,27.125 13.725,27.875 18.575,27.875 19.375,27.075 19.375,24.7 20.148,23.927 23.583,23.927 24.225,23.285 24.225,18.646 23.839,18.26 23.822,18.26 22.581,17.019 22.581,16.08 D2.1
  Top Layer w0.5: R4.2 19.906,13.525 21.181,12.25 22.481,12.25 22.581,12.35 R2.2 D2.1@22.581,15.77 ; D2.1 D2.1@22.581,15.77 ; D2.1@22.581,16.08 D2.1@22.581,15.77
  Bottom Layer w0.4: Q3.1@5.4,20.86 Q3.1@5.575,20.685
  Bottom Layer w0.6: Q3.1@5.575,20.685 5.65,20.76 v1(5.65,22.05)
NetD2_2: D2.2 R2.1 U1.4 | length 5.7
  Top Layer w0.6: U1.4 19.066,15.805 D2.2 20.181,15.925 21.031,15.075 R2.1
NetD6_1: D6.1 D9.2 Q2.1 R5.1 R7.2 | length 28.4
  Top Layer w0.4: v1(30.975,9.25) 33.6,9.25 38.325,13.975 40.125,13.975 40.775,14.625 40.775,18.725 41.95,19.9 41.95,20 41.95,23.426 D6.1
  Top Layer w0.5: R7.2 39.406,21.025 40.431,20 41.95,20 D9.2
  Bottom Layer w0.4: Q2.1@28.1,8.76 28.21,8.65 30.375,8.65 v1(30.975,9.25)
NetD6_2: D6.2 R5.2 U2.7 | length 6.1
  Top Layer w0.6: U2.7 37.446,22.46 D6.2 39.981,23.575 40.406,23.15 R5.2
NetD7_1: D7.1 D10.2 Q4.1 R6.1 R8.2 | length 35.6
  Top Layer w0.4: v1(23.875,17.125) 23.875,17.375 25.236,18.736 25.236,19.719 D7.1 25.23,19.806 D7.1@25.081,19.955
  Top Layer w0.5: D7.1@25.081,19.955 25.081,23.325 25.231,23.475 26.481,23.475 27.756,22.2 R8.2
  Bottom Layer w0.4: Q4.1@5.4,8.885 8.56,8.885 9.75,10.075 9.75,15.707 11.108,17.065 23.585,17.065 v1@23.64,17.12
NetD7_2: D7.2 R6.2 U2.4 | length 5.7
  Top Layer w0.6: R6.2@26.631,21.6 26.631,20.65 27.481,19.8 28.35,19.8 28.47,19.92 U2.4
NetDS1_2: DS1.2 R15.1 | length 1.6
  Top Layer w0.7: R15.1 DS1.2
NetDS2_2: DS2.2 R16.1 | length 2.3
  Top Layer w0.6: DS2.2@32.331,25.75 R16.1
NetDS3_2: DS3.2 R17.1 | length 1.9
  Top Layer w0.4: R17.1 DS3.2
NetP?_5: P?.5 R12.1 U3.6 | length 16.1
  Top Layer w0.2: P?.5 2.265,12.535 3.025,11.775 3.025,8.274 4.174,7.125 7.019,7.125 8.525,5.619 8.525,4.573 9.088,4.01 9.715,4.01 U3.6 11.325,3.925 R12.1
NetP?_6: P?.6 R13.1 U3.5 | length 13.9
  Top Layer w0.2: P?.6 2.725,9.245 2.725,8.15 4.375,6.5 7.22,6.5 8.225,5.495 8.225,4.188 8.26,4.188 9.088,3.36 9.715,3.36 U3.5
  Top Layer w0.3: U3.5 9.85,3.225 R13.1
NetQ1_2: Q1.2 Q2.2 R19.1 U3.2 | length 34.4
  Top Layer w0.2: U3.2 6.793,4.518 5.4,4.518 4.275,3.393 4.275,1.875 4.925,1.225 32.176,1.225 32.875,1.924 v1(32.875,2.625)
pads on no net: R15.0 R16.0 R17.0 U1.0 U1.2 U2.0 U2.2
copper on no net: | length 24.2
  Top Layer w0.2: 26.43,4.719 26.43,4.846 26.43,5.481 26.811,5.1 27.192,5.481 27.192,4.719 ; 27.573,4.719 27.573,5.481 28.208,5.481 28.208,4.719 27.586,4.719 ; 28.589,4.719 28.589,5.481 29.097,5.481 29.097,5.227 28.97,5.1 28.843,5.1 29.097,4.846 29.097,4.719 ; 29.334,4.156 29.334,3.648 29.588,3.394 29.842,3.648 29.842,4.156 ; 29.478,4.719 29.478,5.481 29.986,5.481 29.986,5.227 29.859,5.1 29.732,5.1 ; 30.35,3.775 30.858,3.775 30.858,3.394 30.35,3.394 30.35,4.156 30.858,4.156 ; 30.367,4.719 30.367,5.1 30.367,5.481 ; 30.494,5.1 30.875,5.1 ; 30.875,4.719 30.875,5.481 ; 31.256,4.719 31.764,4.719 ; 31.256,5.1 31.764,5.1 ; 31.256,5.481 31.764,5.481 ; 32.145,5.481 32.145,4.846 32.272,4.719 32.653,4.719 32.78,4.846 32.78,5.481 ; 33.161,4.719 33.669,4.719 33.669,5.1 33.161,5.1 33.161,5.481 33.669,5.481
  Top Layer w0.3: 41.575,6.275 42.875,6.275 ; 42.225,5.6 42.225,6.275 42.225,6.875

## Polygon pours and split planes (outlines as drawn)
GND on Bottom Layer (solid, pour order 126): 44.875,0 44.875,30.925 0,30.925 0,0
NetQ1_2 on Bottom Layer "Bottom Layer-BAT 5S" (solid, pour order 112): 44.875,30.55 33.325,30.55 32.7,29.925 32.7,5.55 32.725,5.525 32.875,5.375 44.875,5.375
NetQ1_2 on Bottom Layer (solid, pour order 124): 35.5,5.9 35.545,12.595 30.25,7.3 27.399,7.3 26.925,6.911 26.925,0.15 35.5,0.15
"BAT 5S" on Bottom Layer (solid, pour order 122): 35.775,5.225 35.775,0.2 44.875,0.2 44.875,5.225
no net on Bottom Layer (solid, pour order 120): 30.325,1.625
NetC3_1 on Bottom Layer "Bottom Layer-NetC3_1" (solid, pour order 92): 10.525,20.675 10.525,29.1 10.525,29.175 11.989,30.55 30.975,30.55 31.425,30.1 31.425,23.02 30.261,21.875 25.675,21.875 25.675,19.191 24.652,18.169 10.525,18.169
no net on Bottom Layer "Bottom Layer-No Net 1" (solid, pour order 110): 33.325,29.6
no net on Bottom Layer "Bottom Layer-No Net 2" (solid, pour order 108): 33.325,29.6
no net on Bottom Layer "Bottom Layer-No Net 3" (solid, pour order 106): 33.325,29.6
no net on Bottom Layer "Bottom Layer-No Net 5" (solid, pour order 104): 33.55,29.575
NetC7_1 on Bottom Layer "Bottom Layer-NetC7_1" (solid, pour order 98): 26.175,9.6 26.175,1.925 24.4,0.15 12.3,0.15 10.601,1.849 10.6,5.55 10.6,15.925 11.35,16.675 22.325,16.675 22.95,16.05 29.125,16.05 30,15.175 30,10.85 28.736,9.6
no net on Bottom Layer "Bottom Layer-No Net 6" (solid, pour order 96): 10.199,15.521
no net on Bottom Layer "Bottom Layer-No Net 4" (solid, pour order 86): 52.85,18.875
NetC3_1 on Bottom Layer "Bottom Layer-No Net" (solid, shelved, pour order 34): 0.074,53 9.356,53 9.356,27.75 0.074,27.75
"BAT 5S" on Bottom Layer "NONET_L02_P042" (solid, shelved, pour order 42): 22.231,31.425 28.631,31.425 28.631,23.65 22.231,23.65
GND on Bottom Layer "GND" (solid, remove dead copper, shelved, pour order 50): -0.3,4.925 28.002,4.925 28.175,5.004 32.93,5.004 33.213,5.287 33.375,5.354 42.825,5.354 43.054,5.125 43.054,4.925 51.262,4.925 51.262,53.525 -0.3,53.525
GND on Bottom Layer "GND" (solid, remove dead copper, shelved, pour order 46): 0.208,6.004 50.754,6.004 50.754,53.525 0.208,53.525
"BAT 5S" on Bottom Layer "BAT 5S" (solid, remove dead copper, shelved, pour order 44): 21.671,31.15 21.671,24.165 23.576,22.26 27.64,22.26 29.545,24.165 29.545,31.15
GND on Top Layer (solid, pour order 130): 0,30.925 44.875,30.925 44.875,0 0,0
GND on Top Layer "GND" (solid, remove dead copper, shelved, pour order 48): -0.3,53.525 51.262,53.525 51.262,5.496 -0.3,5.496
GND on Top Layer "GND" (solid, remove dead copper, shelved, pour order 52): -0.3,53.525 51.262,53.525 51.262,4.925 -0.3,4.925

## Keep-outs
Keep-Out Layer:
  the board outline again, w0.254

## Silkscreen, mask and mechanical layers (free items; w line width, h text height)
Top Overlay:
  text "VBAT" at 14.956,33.225 h1.52
  text "GND" at 8.956,33.1 h1.52
  text "M1" at 34.37,14.473 h1.52
Mechanical 1:
  lines w0.2: -0.4,4.925 ccw(c-0.3,4.925) -0.3,4.825 cw(c-0.3,4.925) -0.4,4.925 ; -0.4,53.525 cw(c-0.3,53.525) -0.3,53.625 ccw(c-0.3,53.525) -0.4,53.525